# EAGLE board Top_68060_mk2a (EAGLE 6.4)
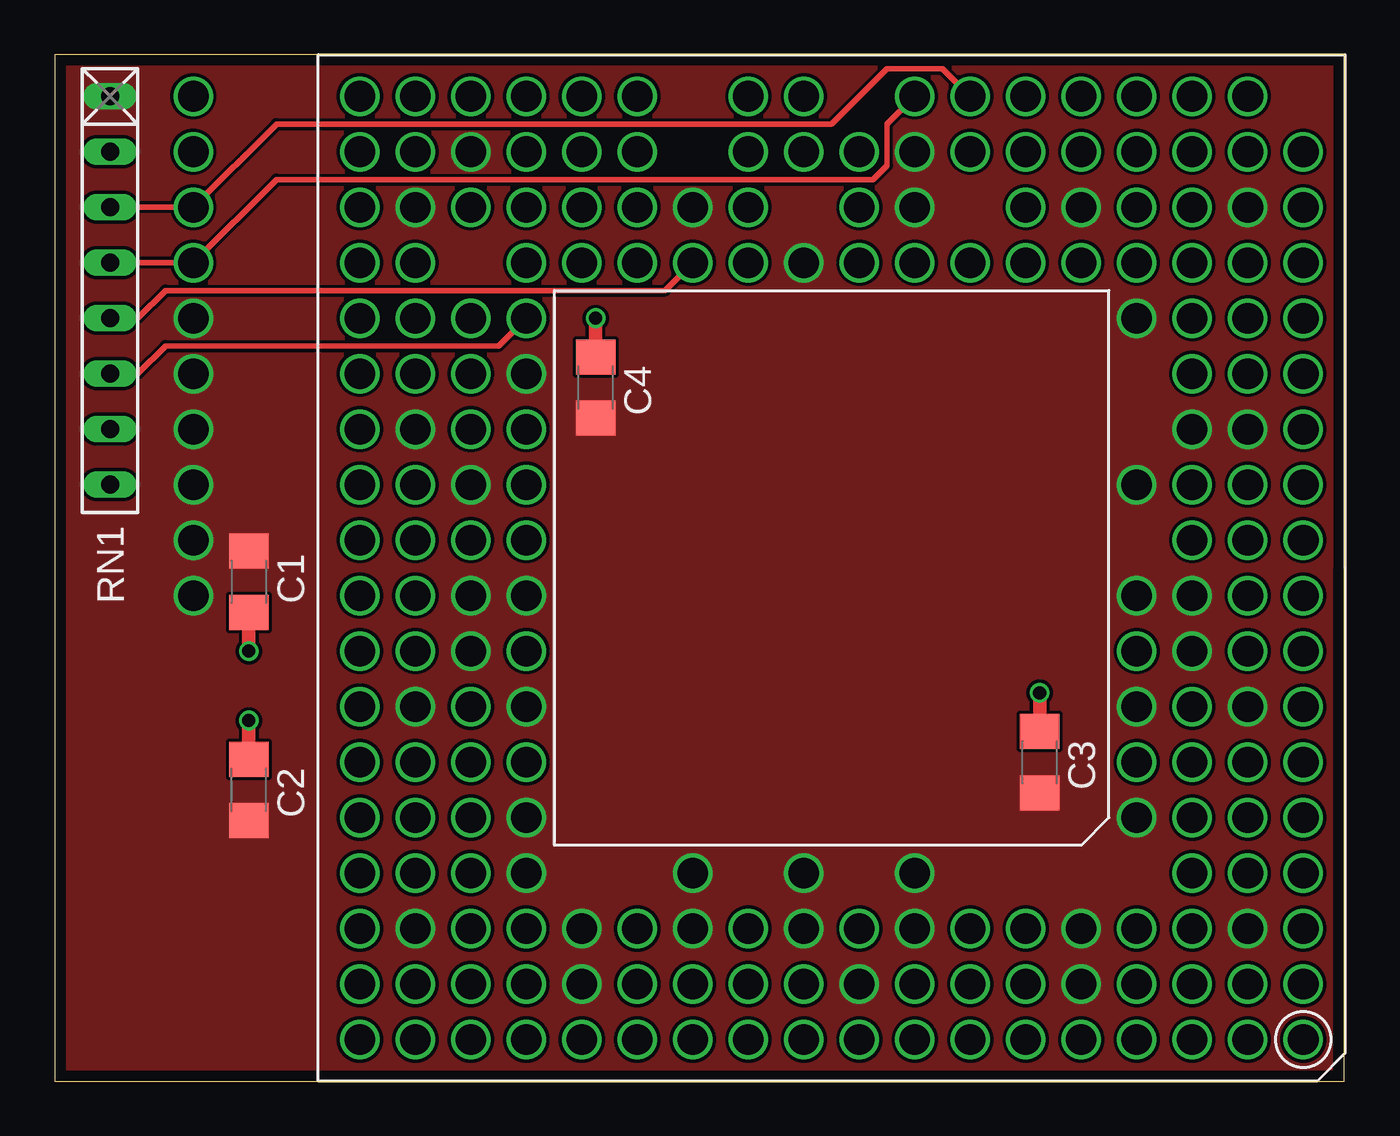
[diagram p0: board, top side]
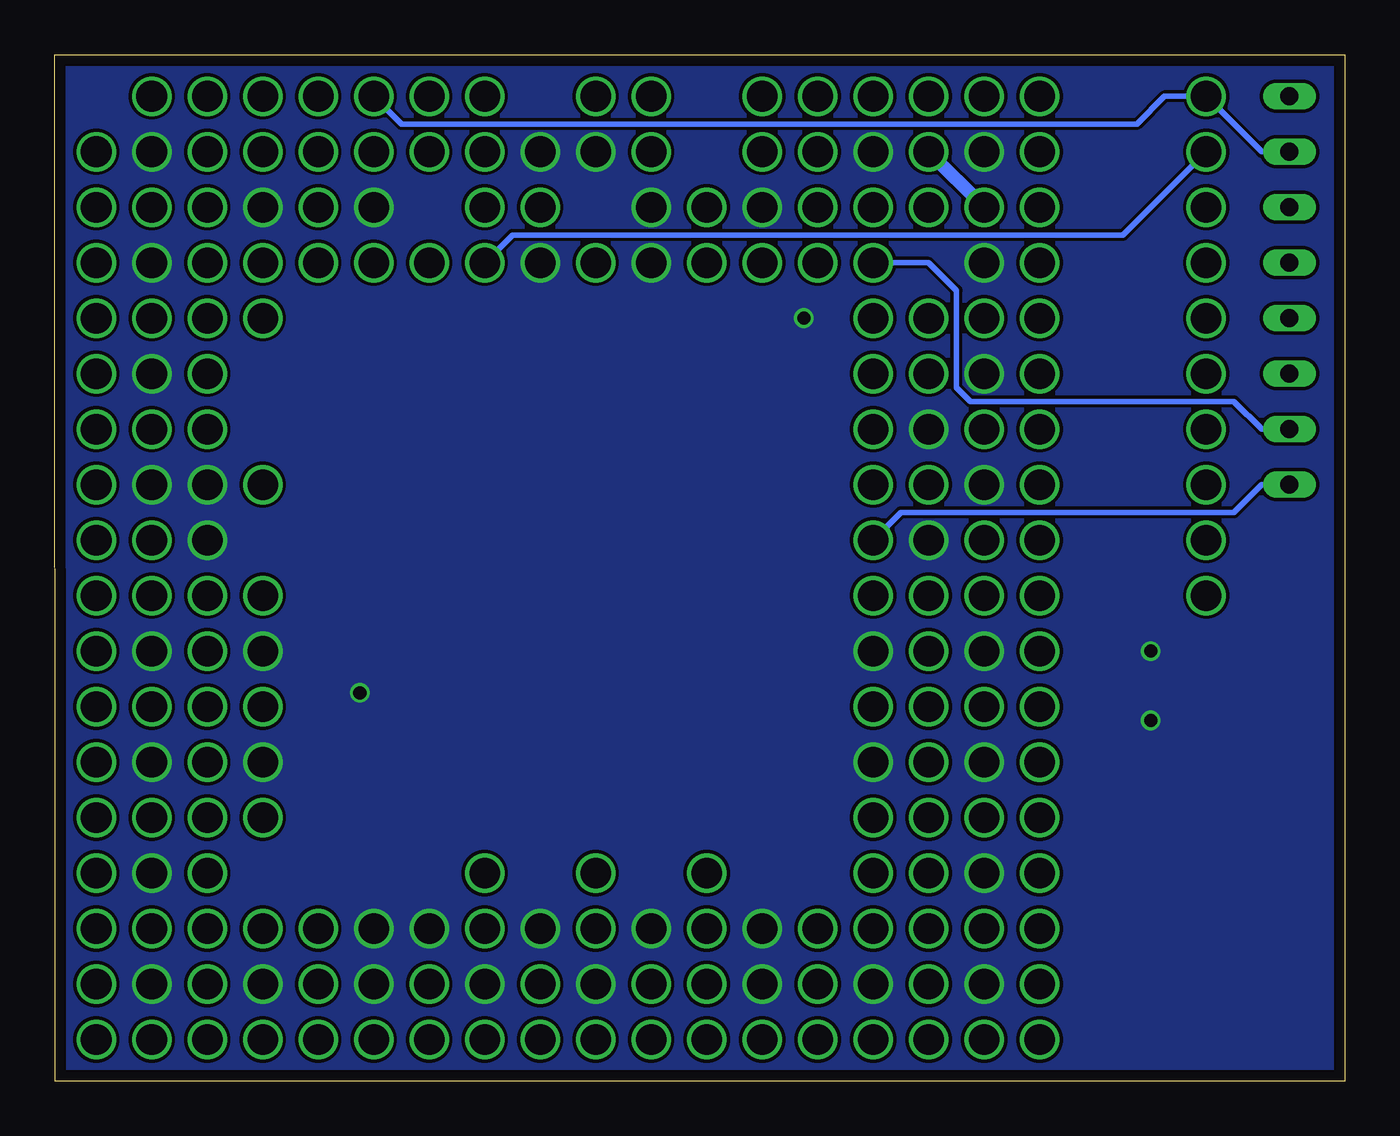
[diagram p1: board, bottom side, seen from below]

Size 59.05 x 46.99 mm. Coordinates in mm from the lower left corner, seen from the top.
Outline: 0,0 59.03,0 59.05,46.99 0,46.99 0,0
Copper layers (1*16): Top 0.035mm / dielectric 1.5mm / Bottom 0.035mm
Design rules "leiton": minimum track width 6mil, minimum drill 0.3mm, track to track 6mil, track to pad 6mil, pad to pad 6mil, via to via 6mil, smd to smd 6mil, copper to edge 20mil, drill to drill 8mil, minimum pad ring 8mil, minimum via ring 6mil, stop-mask expansion 3mil, vias tented up to drill 0mil, thermal gap 8mil

## Footprints (pad centres in the part's own frame; a part is rotated, then mirrored left to right if it is on the bottom)
C1206 = smd 1.6 x 1.8: 1 -1.4,0; 2 1.4,0
PGA206_BIG = drill 1.4 pad 1.7: A01 -21.59,21.59; A02 -19.05,21.59; A03 -16.51,21.59; A04 -13.97,21.59; A05 -11.43,21.59; A06 -8.89,21.59; A07 -6.35,21.59; A08 -3.81,21.59; A09 -1.27,21.59; A10 1.27,21.59; A11 3.81,21.59; A12 6.35,21.59; A13 8.89,21.59; A14 11.43,21.59; A15 13.97,21.59; A16 16.51,21.59; A17 19.05,21.59; A18 21.59,21.59; B01 -21.59,19.05; B02 -19.05,19.05; B03 -16.51,19.05; B04 -13.97,19.05; B05 -11.43,19.05; B06 -8.89,19.05; B07 -6.35,19.05; B08 -3.81,19.05; B09 -1.27,19.05; B10 1.27,19.05; B11 3.81,19.05; B12 6.35,19.05; B13 8.89,19.05; B14 11.43,19.05; B15 13.97,19.05; B16 16.51,19.05; B17 19.05,19.05; B18 21.59,19.05; C01 -21.59,16.51; C02 -19.05,16.51; C03 -16.51,16.51; C04 -13.97,16.51; C05 -11.43,16.51; C06 -8.89,16.51; C07 -6.35,16.51; C08 -3.81,16.51; C09 -1.27,16.51; C10 1.27,16.51; C11 3.81,16.51; C12 6.35,16.51; C13 8.89,16.51; C14 11.43,16.51; C15 13.97,16.51; C16 16.51,16.51; C17 19.05,16.51; C18 21.59,16.51; D01 -21.59,13.97; D02 -19.05,13.97; D03 -16.51,13.97; D08 -3.81,13.97; D10 1.27,13.97; D12 6.35,13.97; D15 13.97,13.97; D16 16.51,13.97; D17 19.05,13.97; D18 21.59,13.97; E01 -21.59,11.43; E02 -19.05,11.43; E03 -16.51,11.43; E04 -13.97,11.43; E15 13.97,11.43; E16 16.51,11.43; E17 19.05,11.43; E18 21.59,11.43; F01 -21.59,8.89; F02 -19.05,8.89; F03 -16.51,8.89; F04 -13.97,8.89; F15 13.97,8.89; F16 16.51,8.89; F17 19.05,8.89; F18 21.59,8.89; G01 -21.59,6.35; G02 -19.05,6.35; G03 -16.51,6.35; G04 -13.97,6.35; G15 13.97,6.35; G16 16.51,6.35; G17 19.05,6.35; G18 21.59,6.35; H01 -21.59,3.81; H02 -19.05,3.81; H03 -16.51,3.81; H04 -13.97,3.81; H15 13.97,3.81; H16 16.51,3.81; H17 19.05,3.81; H18 21.59,3.81; J01 -21.59,1.27; J02 -19.05,1.27; J03 -16.51,1.27; J04 -13.97,1.27; J15 13.97,1.27; J16 16.51,1.27; J17 19.05,1.27; J18 21.59,1.27; K01 -21.59,-1.27; K02 -19.05,-1.27; K03 -16.51,-1.27; K15 13.97,-1.27; K16 16.51,-1.27; K17 19.05,-1.27; K18 21.59,-1.27; L01 -21.59,-3.81; L02 -19.05,-3.81; L03 -16.51,-3.81; L04 -13.97,-3.81; L15 13.97,-3.81; L16 16.51,-3.81; L17 19.05,-3.81; L18 21.59,-3.81; M01 -21.59,-6.35; M02 -19.05,-6.35; M03 -16.51,-6.35; M15 13.97,-6.35; M16 16.51,-6.35; M17 19.05,-6.35; M18 21.59,-6.35; N01 -21.59,-8.89; N02 -19.05,-8.89; N03 -16.51,-8.89; N15 13.97,-8.89; N16 16.51,-8.89; N17 19.05,-8.89; N18 21.59,-8.89; P01 -21.59,-11.43; P02 -19.05,-11.43; P03 -16.51,-11.43; P04 -13.97,-11.43; P15 13.97,-11.43; P16 16.51,-11.43; P17 19.05,-11.43; P18 21.59,-11.43; Q01 -21.59,-13.97; Q02 -19.05,-13.97; Q03 -16.51,-13.97; Q04 -13.97,-13.97; Q05 -11.43,-13.97; Q06 -8.89,-13.97; Q07 -6.35,-13.97; Q08 -3.81,-13.97; Q09 -1.27,-13.97; Q10 1.27,-13.97; Q11 3.81,-13.97; Q12 6.35,-13.97; Q13 8.89,-13.97; Q14 11.43,-13.97; Q15 13.97,-13.97; Q17 19.05,-13.97; Q18 21.59,-13.97; R01 -21.59,-16.51; R02 -19.05,-16.51; R03 -16.51,-16.51; R04 -13.97,-16.51; R05 -11.43,-16.51; R06 -8.89,-16.51; R08 -3.81,-16.51; R09 -1.27,-16.51; R11 3.81,-16.51; R12 6.35,-16.51; R13 8.89,-16.51; R14 11.43,-16.51; R15 13.97,-16.51; R16 16.51,-16.51; R17 19.05,-16.51; R18 21.59,-16.51; S01 -21.59,-19.05; S02 -19.05,-19.05; S03 -16.51,-19.05; S04 -13.97,-19.05; S05 -11.43,-19.05; S06 -8.89,-19.05; S07 -6.35,-19.05; S08 -3.81,-19.05; S09 -1.27,-19.05; S10 1.27,-19.05; S11 3.81,-19.05; S13 8.89,-19.05; S14 11.43,-19.05; S15 13.97,-19.05; S16 16.51,-19.05; S17 19.05,-19.05; S18 21.59,-19.05; T02 -19.05,-21.59; T03 -16.51,-21.59; T04 -13.97,-21.59; T05 -11.43,-21.59; T06 -8.89,-21.59; T07 -6.35,-21.59; T08 -3.81,-21.59; T10 1.27,-21.59; T11 3.81,-21.59; T13 8.89,-21.59; T14 11.43,-21.59; T15 13.97,-21.59; T16 16.51,-21.59; T17 19.05,-21.59; T18 21.59,-21.59
RN-8 = drill 0.813 long: 1 -8.89,0; 2 -6.35,0; 3 -3.81,0; 4 -1.27,0; 5 1.27,0; 6 3.81,0; 7 6.35,0; 8 8.89,0
10-PIN-1.4HOLES = drill 1.4: P$1 -11.43,0; P$2 -8.89,0; P$3 -6.35,0; P$4 -3.81,0; P$5 -1.27,0; P$6 1.27,0; P$7 3.81,0; P$8 6.35,0; P$9 8.89,0; P$10 11.43,0

## Placement (x,y rotation side)
C1  100n  [C1206]  8.89,22.86 270 top
C2  100n  [C1206]  8.89,13.34 90 top
C3  100n  [C1206]  45.09,14.61 90 top
C4  100n  [C1206]  24.77,31.75 90 top
IC1  MC68060RCPGA_BIG  [PGA206_BIG]  35.56,23.5 180 top
RN1  4k7  [RN-8]  2.54,36.2 270 top
U$1  10POL  [10-PIN-1.4HOLES]  6.35,33.66 270 top

## Library data of the parts
C1-C4 = rcl
IC1 = MC680x0
RN1 = resistor-net; OC_FARNELL: unknown; OC_NEWARK: unknown
U$1 = 10pol

## Nets
+3V3: C1.1 C2.1 C3.1 C4.1 IC1.B05 IC1.B09 IC1.B14 IC1.C02 IC1.C05 IC1.C08 IC1.C10 IC1.C12 IC1.C14 IC1.C17 IC1.D08 IC1.D10 IC1.D12 IC1.D15 IC1.E04 IC1.E15 IC1.G02 IC1.G04 IC1.G15 IC1.G17 IC1.H03 IC1.H16 IC1.J03 IC1.J04 IC1.J15 IC1.J16 IC1.L04 IC1.L16 IC1.M02 IC1.M03 IC1.M17 IC1.N15 IC1.P04 IC1.Q10 IC1.R02 IC1.R05 IC1.R08 IC1.R12 IC1.R17 IC1.S08 IC1.S16 RN1.1 U$1.P$5 U$1.P$6 U$1.P$7 U$1.P$8 U$1.P$9 U$1.P$10
BTT: IC1.Q15 RN1.7
CLA: IC1.K15 RN1.8
CLKEN: IC1.Q08 U$1.P$2
GND: C1.2 C2.2 C3.2 C4.2 IC1.B02 IC1.B04 IC1.B06 IC1.B08 IC1.B10 IC1.B13 IC1.B15 IC1.B17 IC1.C06 IC1.C07 IC1.C09 IC1.C11 IC1.C13 IC1.D02 IC1.D17 IC1.F02 IC1.F04 IC1.F15 IC1.F17 IC1.H02 IC1.H04 IC1.H15 IC1.H17 IC1.K03 IC1.K16 IC1.L02 IC1.L03 IC1.L17 IC1.M16 IC1.N02 IC1.N17 IC1.Q02 IC1.Q09 IC1.Q11 IC1.Q17 IC1.R04 IC1.R06 IC1.R11 IC1.R13 IC1.S02 IC1.S09 IC1.S10 IC1.S15 IC1.S17
IPL0: IC1.T08 RN1.4 U$1.P$4
IPL1: IC1.T07 RN1.3 U$1.P$3
IPL2: IC1.T06 RN1.2 U$1.P$1
SNOOP: IC1.P15 RN1.6
TRA: IC1.Q12 RN1.5

## Tracks (layer width: path | path; a pad name or v marks a point on that pad's centre or on a via)
+3V3
  Bottom 0.61: IC1.S16 IC1.R17
  pour Top (no thermals): 0,46.99 59.05,46.99 59.05,0 0,0
BTT
  Bottom 0.254: IC1.Q15 19.05,37.47 17.78,36.2 17.78,31.75 17.14,31.11 5.08,31.11 3.81,29.84 RN1.7
CLA
  Bottom 0.254: IC1.K15 20.32,26.04 5.08,26.04 3.81,27.3 RN1.8
CLKEN
  Bottom 0.254: U$1.P$2 10.16,38.73 38.1,38.73 IC1.Q08
GND  (via drill 0.6)
  Top 0.61: C1.2 v8.89,19.68 | v8.89,16.51 C2.2 | C3.2 v45.09,17.78 | C4.2 v24.77,34.92
  pour Bottom (no thermals): 0,46.99 0,0 59.05,0 59.05,46.99
IPL0
  Top 0.254: RN1.4 U$1.P$4 10.16,41.27 37.47,41.27 38.1,41.91 38.1,43.81 IC1.T08
IPL1
  Top 0.254: RN1.3 U$1.P$3 10.16,43.81 35.56,43.81 38.1,46.35 40.64,46.35 IC1.T07
IPL2
  Bottom 0.254: RN1.2 3.81,42.55 U$1.P$1 8.26,45.09 9.53,43.81 43.18,43.81 IC1.T06
SNOOP
  Top 0.254: RN1.6 3.81,32.38 5.08,33.66 20.32,33.66 IC1.P15
TRA
  Top 0.254: IC1.Q12 27.94,36.2 5.08,36.2 3.81,34.92 RN1.5